# Altium PCB PCB1.PcbDoc
Units mil, origin at the board's own origin, x right, y up, seen from the top; angles counter-clockwise.
Board outline 3937.01 x 1968.5 mil, 2 copper layers (Top Layer, Bottom Layer); 95 components, 84 nets, 313 pads, 79 vias.
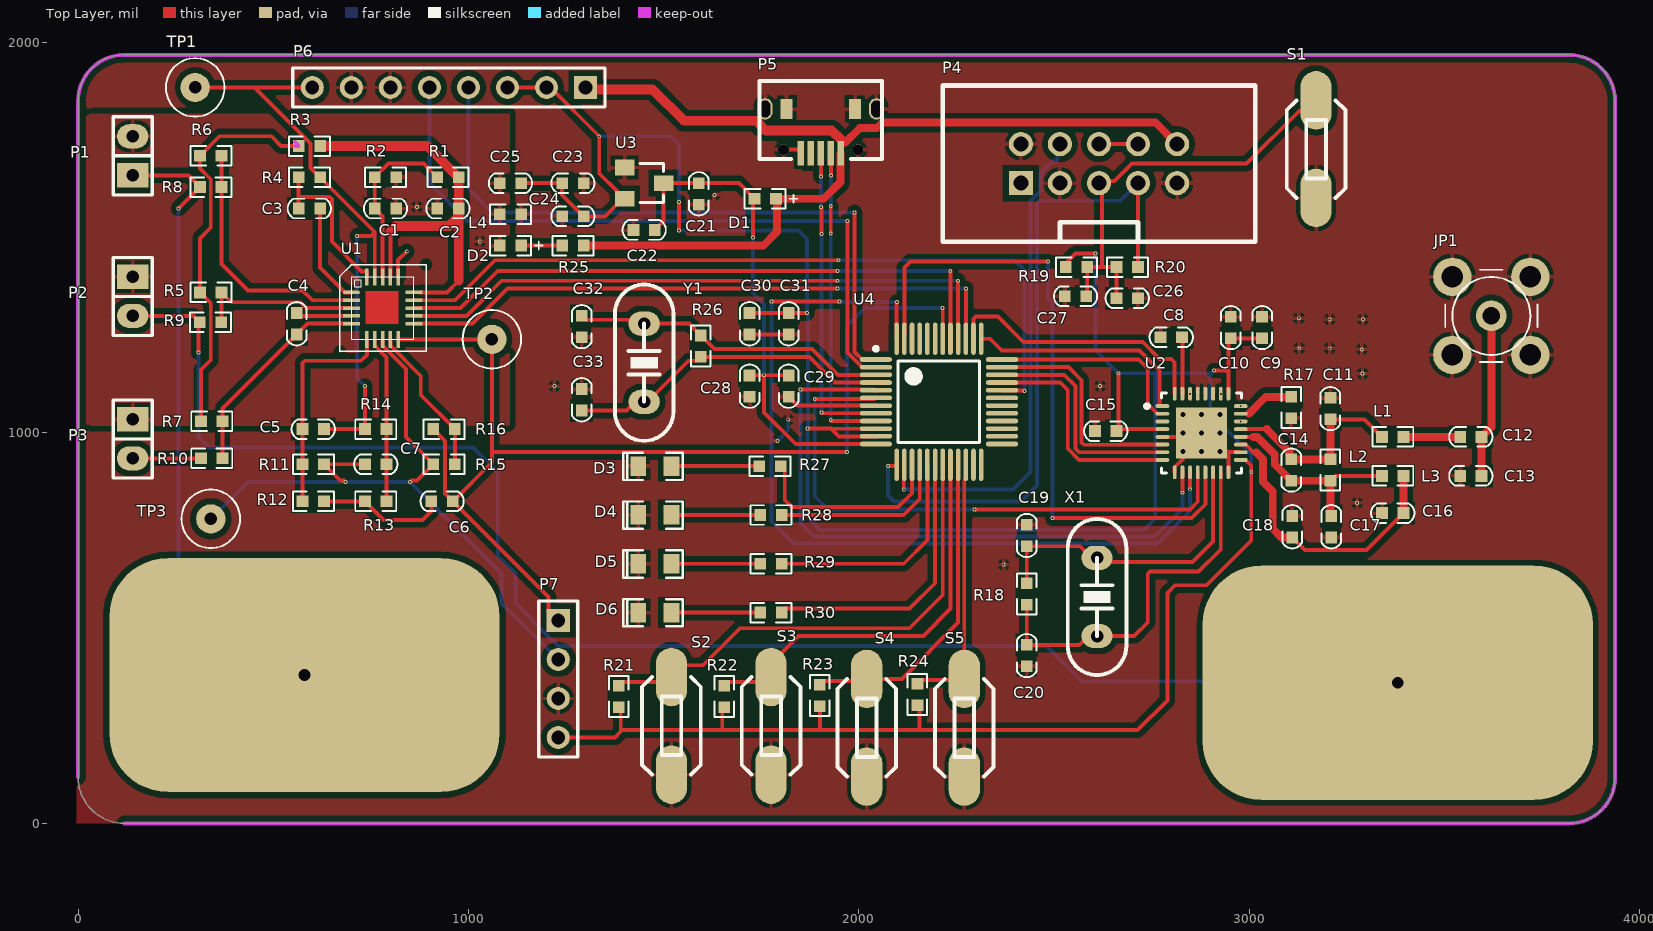
[diagram p0: Top Layer view]
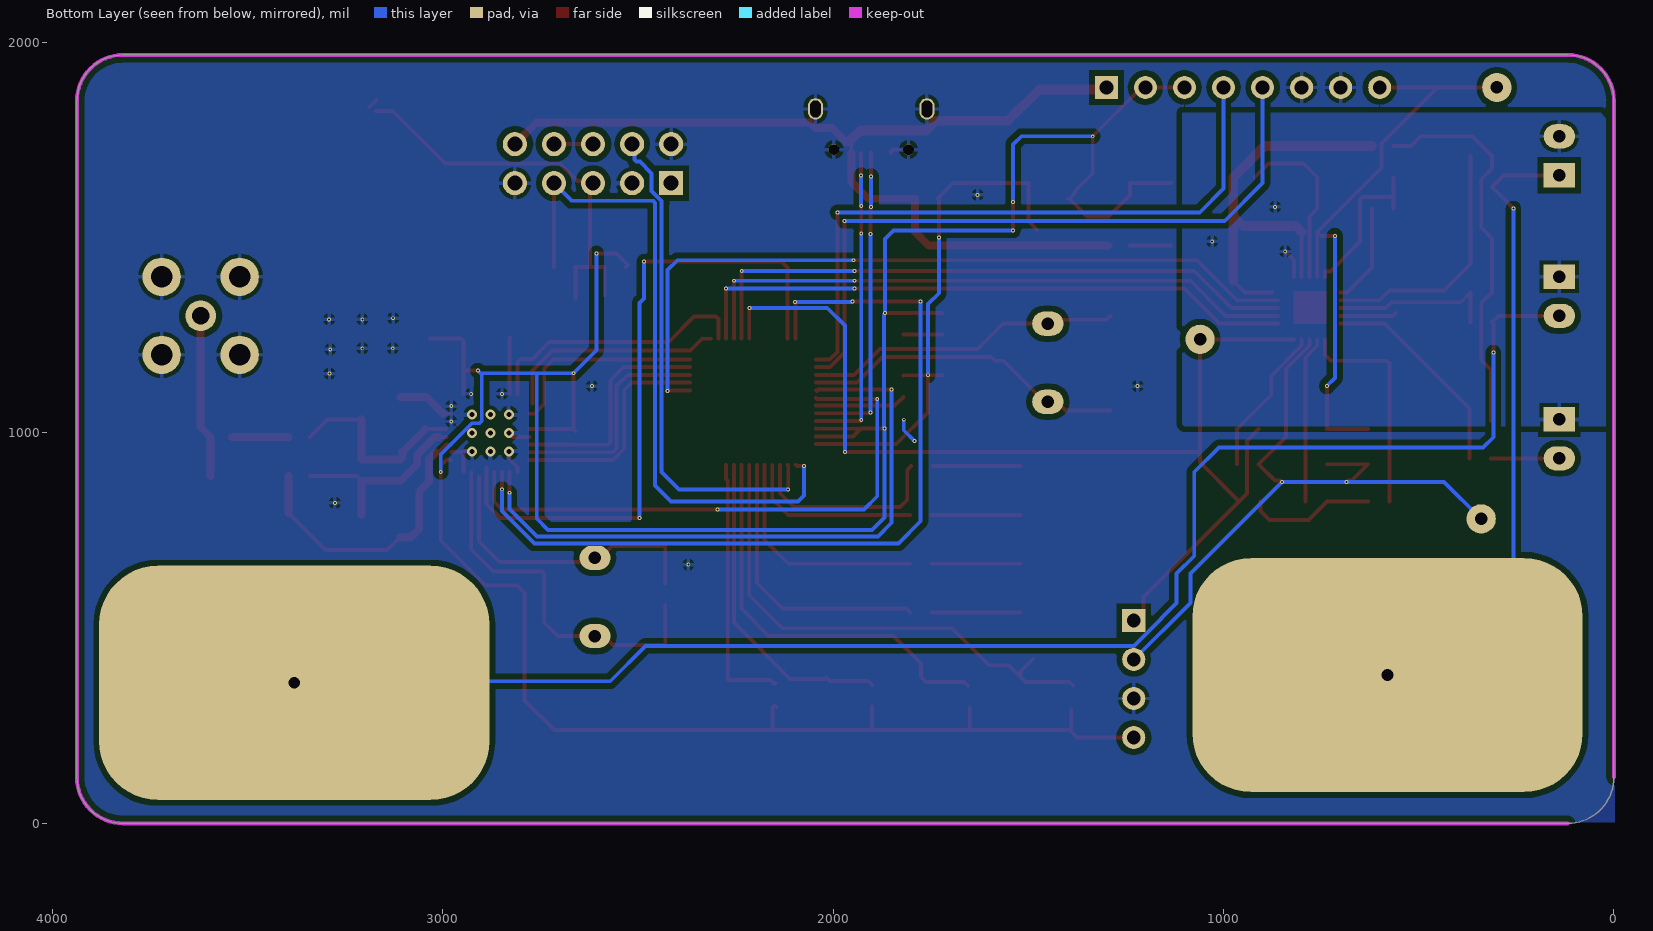
[diagram p1: Bottom Layer view, seen from below]
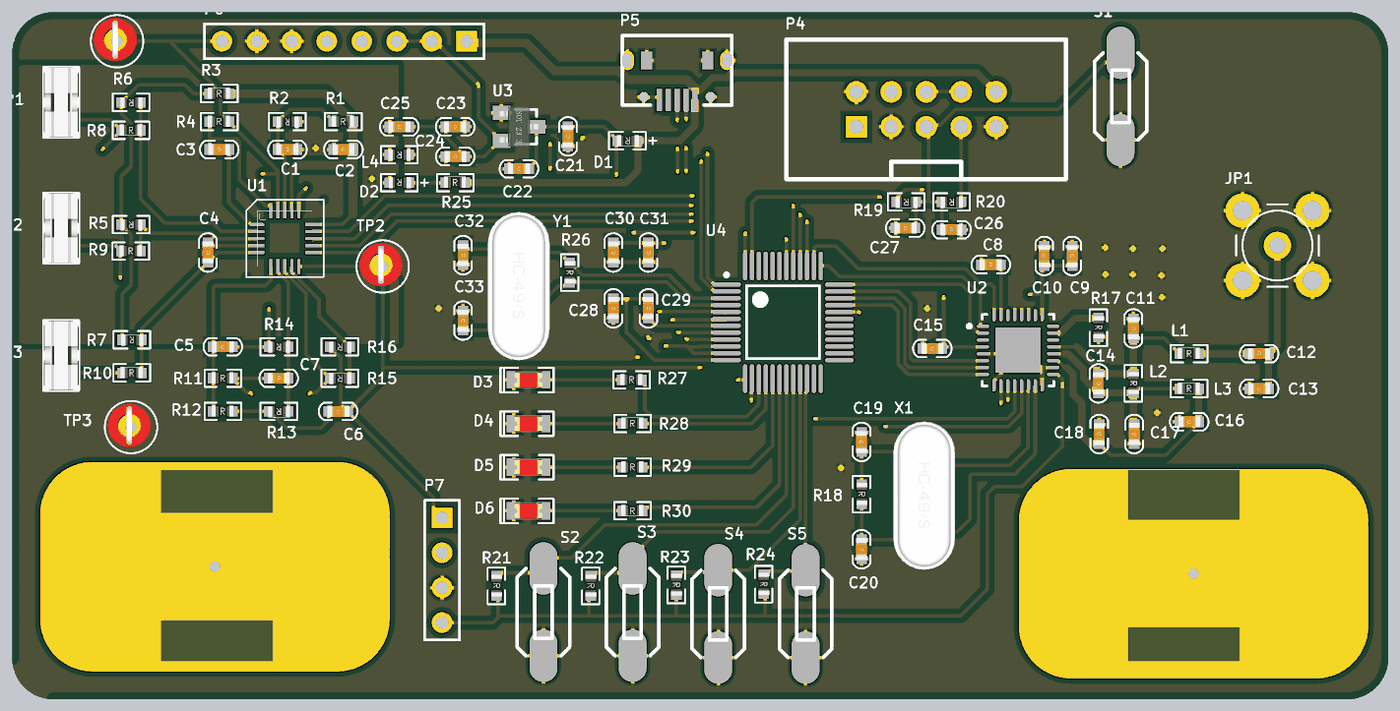
[diagram p2: 3D render of the assembled board from above, using the file's embedded part models]

## Layer stack, top to bottom
Top Solder: solder mask 0.4, Solder Resist, Dk 3.5
Top Layer: signal copper 1.4
Dielectric 1: dielectric 12.6, FR-4, Dk 4.8
Bottom Layer: signal copper 1.4
Bottom Solder: solder mask 0.4, Solder Resist, Dk 3.5

## Board outline
0,118.37 0,1850.39 cw(c118.11,1850.39) 118.11,1968.5 3818.9,1968.5 cw(c3818.9,1850.39) 3937.01,1850.39 3937.01,118.11 cw(c3818.9,118.11) 3818.9,0 118.38,0 cw(c118.38,118.37)

## Design rules (kind name [scope] priority, off if disabled: settings)
Clearance poly [InPolygon] p1: gap=15 ignorepadtopadclearanceinfootprint=TRUE
Clearance Clearance_1 [All] p2: gap=0 ignorepadtopadclearanceinfootprint=TRUE
MinimumSolderMaskSliver [All] p1: minsoldermaskwidth=1
PolygonConnect [All] p1: connectstyle=Relief reliefconductorwidth=10 reliefentries=4 polygonreliefangle="90 Angle" airgapwidth=10
RoutingVias [All] p1: holewidth=5 width=10 viastyle="Through Hole" minholewidth=5 minwidth=10 maxholewidth=5 maxwidth=10
SilkToSilkClearance [All] p1: silktosilkclearance=1
SilkToSolderMaskClearance [IsPad] p1: minsilkscreentomaskgap=1 clearancetoexposedcopper=TRUE
SolderMaskExpansion [All] p1: expansion=4 istentingtop=FALSE
Width [All] p1: maxlimit=25 minlimit=1 preferedwidth=10 minimp=50.000000 maximp=50.000000 favimp=50.000000
27 further rules are at their usual default settings.

## Classes and differential pairs
component class Sheet3: C21 C22 C23 C24 C25 C26 C27 C28 C29 C30 C31 C32 C33 D1 D2 D3 D4 D5 D6 L4 P4 P5 P6 P7 R19 R20 R21 R22 R23 R24 R25 R26 R27 R28 R29 R30 S1 S2 S3 S4 S5 U3 U4 Y1
component class Sheet2: C8 C9 C10 C11 C12 C13 C14 C15 C16 C17 C18 C19 C20 JP1 L1 L2 L3 R17 R18 U2 X1
component class Sheet1: C1 C2 C3 C4 C5 C6 C7 P1 P2 P3 R1 R2 R3 R4 R5 R6 R7 R8 R9 R10 R11 R12 R13 R14 R15 R16 TP1 TP2 TP3 U1

## Components (designator, comment, footprint, x,y, rotation, side; value= is the part's Value field where it differs from the comment)
C1 "0.1uF" 0603C 787.5,1575 r180 top value=4700pF
C2 "0.1uF" 0603C 947.5,1575 r0 top value=4700pF
C3 "0.22uF" 0603C 592.5,1575 r180 top value=4700pF
C4 "1nF" 0603C 560,1280 r90 top value=4700pF
C5 "0.22uF/NC" 0603C 602.5,1010 r0 top value=4700pF
C6 "3.3nF/NC" 0603C 932.5,825 r0 top value=4700pF
C7 "22nF/NC" 0603C 762.5,920 r180 top value=4700pF
C8 "10nF" 0603C 2800,1245 r180 top value=4700pF
C9 "33pF" 0603C 3032.76,1270 r270 top value=4700pF
C10 "4.7nF" 0603C 2952.76,1270 r270 top value=4700pF
C11 "18pF" 0603C 3207.76,1062.5 r90 top value=4700pF
C12 "6.8pF" 0603C 3567.5,990 r180 top value=4700pF
C13 "" 0603C 3567.5,890 r0 top value=4700pF
C14 "" 0603C 3107.76,905 r90 top value=4700pF
C15 "33p" 0603C 2632.5,1005 r0 top value=4700pF
C16 "180pF" 0603C 3367.5,795 r0 top value=4700pF
C17 "18pF" 0603C 3210,760 r90 top value=4700pF
C18 "33nF" 0603C 3110,760 r270 top value=4700pF
C19 "15P" 0603C 2430,737.5 r270 top value=4700pF
C20 "15P" 0603C 2430,430 r90 top value=4700pF
C21 "106" 0603C 1590,1612.5 r90 top value=4700pF
C22 "104" 0603C 1450,1520 r0 top value=4700pF
C23 "106" 0603C 1267.5,1640 r180 top value=4700pF
C24 "104" 0603C 1267.5,1555 r0 top value=4700pF
C25 "4700pF" 0603C 1107.5,1640 r0 top
C26 "104" 0603C 2687.5,1345 r180 top value=4700pF
C27 "106" 0603C 2555,1350 r0 top value=4700pF
C28 "104" 0603C 1720,1120 r90 top value=4700pF
C29 "106" 0603C 1820,1120 r90 top value=4700pF
C30 "106" 0603C 1720,1280 r90 top value=4700pF
C31 "104" 0603C 1820,1280 r90 top value=4700pF
C32 "30pF" 0603C 1290,1272.5 r90 top value=4700pF
C33 "30pF" 0603C 1290,1085 r270 top value=4700pF
D1 "1N4007" 0603-D 1760,1600 r180 top
D2 "LED2" 0603-D 1107.5,1480 r180 top
D3 "LED2" LED0805R 1520,915 r180 top
D4 "LED2" LED0805R 1520,790 r180 top
D5 "LED2" LED0805R 1520,665 r180 top
D6 "LED2" LED0805R 1520,540 r180 top
JP1 "Header 5" SMA 3620,1300 r0 top
L1 "Inductor" 0603 3367.5,990 r0 top value=39nH
L2 "Inductor" 0603 3207.76,905 r270 top value=12nH
L3 "Inductor" 0603 3367.5,890 r0 top value=39nH
L4 "Inductor" 0603 1107.5,1560 r180 top value=100MHz600R
P1 "Header 2" SIP2 140,1660 r90 top
P2 "Header 2" SIP2 140,1400 r270 top
P3 "Header 2" SIP2 140,1035 r270 top
P4 "Header 10" IDC10L 2415,1640 r0 top
P5 "USB-mini" USB-Micro 1902.4,1727.05 r0 top
P6 "Header 8" HDR1X8 1300,1885 r180 top
P7 "Header 4" HDR1X4 1230,520 r270 top
R1 "10M" 0603R 947.5,1655 r0 top value=50K
R2 "10M" 0603R 787.5,1655 r180 top value=50K
R3 "0/NC" 0603R 592.5,1735 r0 top value=50K
R4 "10M" 0603R 592.5,1655 r0 top value=50K
R5 "10M" 0603R 340,1360 r180 top value=50K
R6 "10M" 0603R 340,1710 r180 top value=50K
R7 "NC/0" 0603R 342.5,1030 r180 top value=50K
R8 "180K" 0603R 340,1630 r0 top value=50K
R9 "180K" 0603R 339.5,1284 r0 top value=50K
R10 "360K/NC" 0603R 342.5,935 r0 top value=50K
R11 "100K/NC" 0603R 602.5,920 r0 top value=50K
R12 "1M/NC" 0603R 602.5,825 r0 top value=50K
R13 "1M/NC" 0603R 762.5,825 r180 top value=50K
R14 "NC/0" 0603R 762.5,1010 r180 top value=50K
R15 "100K/NC" 0603R 937.5,920 r180 top value=50K
R16 "1M/0" 0603R 937.5,1010 r180 top value=50K
R17 "22K" 0603R 3107.76,1065 r270 top value=50K
R18 "1M" 0603R 2430,587.5 r270 top value=50K
R19 "1K" 0603R 2557.5,1425 r180 top value=50K
R20 "50K" 0603R 2687.5,1425 r180 top
R21 "10K" 0603R 1385,325 r270 top value=50K
R22 "10K" 0603R 1655,325 r270 top value=50K
R23 "10K" 0603R 1900,327.5 r270 top value=50K
R24 "10K" 0603R 2150,330 r270 top value=50K
R25 "2K" 0603R 1267.5,1480 r0 top value=50K
R26 "10M" 0603R 1595,1222.5 r270 top value=50K
R27 "3.6K" 0603R 1772.5,915 r0 top value=50K
R28 "3.6K" 0603R 1775,790 r0 top value=50K
R29 "3.6K" 0603R 1775,665 r0 top value=50K
R30 "3.6K" 0603R 1775,540 r0 top value=50K
S1 "SW-PB" SW-BP-SMD 3171,1727 r90 top
S2 "SW-PB" SW-BP-SMD 1520,250 r90 top
S3 "SW-PB" SW-BP-SMD 1775,250 r90 top
S4 "SW-PB" SW-BP-SMD 2020,245 r90 top
S5 "SW-PB" SW-BP-SMD 2270,245 r90 top
TP1 "TP-1" tp-1-1 300,1885 r0 top
TP2 "TP-1" tp-1-1 1060,1240 r0 top
TP3 "TP-1" tp-1-1 340,780 r0 top
U1 "AD8232" QFN-20 700,1360 r0 top
U2 "NRF905" QFN32_M 2877.76,1000 r0 top
U3 "XC6206" SOT-23-123 1450,1640 r90 top
U4 "C8051F340/1/4/5" TQFP48_M 2205,1080 r0 top
X1 "16M" CY2 2610,680 r270 top
Y1 "3.2768MHz" CY2 1450,1280 r270 top

## Footprints (in the part's own frame and the unit in brackets; to place one, negate y for a bottom-side part, rotate by r counter-clockwise, add the part's x,y. Pads: shape width x height; smd on the part's side, far side on the other; paste and mask are expansions set on the pad)
0603 [mil]
  rect 30x30 smd: 1(-27.5,0) 2(27.5,0)
  silkscreen extent -52,-25 52,25, body extent -32,-15 30,17, height 21
0603-D [mil]
  rect 30x30 smd: A(-27.5,0) K(27.5,0)
  silkscreen extent -82,-25 52,25, body extent -33,-16 30,16, height 21
0603C [mil]
  rect 30x30 smd: 1(-27.5,0) 2(27.5,0)
  silkscreen extent -55,-25 55,25, body extent -31,-16 32,16, height 35
0603R [mil]
  rect 30x30 smd: 1(-27.5,0) 2(27.5,0)
  silkscreen extent -52,-25 52,25, body extent -32,-15 30,17, height 21
CY2 [mil]
  oval 62x80 hole 32: 1(0,0) 2(200,0)
  silkscreen extent -100,-75 300,75, body extent -116,-89 309,88, height 138
HDR1X4 [mm] "Connector; Header; 4 Position"
  rect 1.5x1.5 hole 0.9: 1(0,0)
  round 1.5 hole 0.9: 2(2.54,0) 3(5.08,0) 4(7.62,0)
  silkscreen extent -1.27,-1.27 8.89,1.27
HDR1X8 [mm] "Connector; Header; 8 Position"
  rect 1.5x1.5 hole 0.9: 1(0,0)
  round 1.5 hole 0.9: 2(2.54,0) 3(5.08,0) 4(7.62,0) 5(10.16,0) 6(12.7,0) 7(15.24,0) 8(17.78,0)
  silkscreen extent -1.27,-1.27 19.05,1.27
IDC10L [mil]
  rect 62x62 hole 39: 1(0,0)
  round 62 hole 39: 2(0,100) 3(100,0) 4(100,100) 5(200,0) 6(200,100) 7(300,0) 8(300,100) 9(400,0) 10(400,100)
  silkscreen extent -200,-150 600,250
LED0805R [mil]
  rect 40x50 smd: 1(0,0) 2(85,0)
  silkscreen extent -29,-35 123,35, body extent 3,-24 83,25, height 43
QFN32_M [mm] "QFN, 32-Leads, Body 5x5mm, Pitch 0.5mm, IPC Low Density"
  oval 0.9x0.25 smd: 1(-2.55,1.75) 2(-2.55,1.25) 3(-2.55,0.75) 4(-2.55,0.25) 5(-2.55,-0.25) 6(-2.55,-0.75) 7(-2.55,-1.25) 8(-2.55,-1.75) 17(2.55,-1.75) 18(2.55,-1.25) 19(2.55,-0.75) 20(2.55,-0.25) 21(2.55,0.25) 22(2.55,0.75) 23(2.55,1.25) 24(2.55,1.75)
  oval 0.25x0.9 smd: 9(-1.75,-2.55) 10(-1.25,-2.55) 11(-0.75,-2.55) 12(-0.25,-2.55) 13(0.25,-2.55) 14(0.75,-2.55) 15(1.25,-2.55) 16(1.75,-2.55) 25(1.75,2.55) 26(1.25,2.55) 27(0.75,2.55) 28(0.25,2.55) 29(-0.25,2.55) 30(-0.75,2.55) 31(-1.25,2.55) 32(-1.75,2.55)
  rect 3.3x3.3 smd: 33(0,0)
  silkscreen extent -3.67,-2.6 2.6,2.6, body extent -2.58,-2.58 2.58,2.58, height 0.8
QFN-20 [mm]
  oval 1.1x0.23 smd: 1(0,0)
  rect 1.1x0.23 smd: 2(0,-0.508) 3(0,-1.016) 4(0,-1.524) 5(0,-2.032) 11(4.064,-2.032) 12(4.064,-1.524) 13(4.064,-1.016) 14(4.064,-0.508) 15(4.064,0)
  rect 0.23x1.1 smd: 6(1.016,-3.048) 7(1.524,-3.048) 8(2.032,-3.048) 9(2.54,-3.048) 10(3.048,-3.048) 16(3.048,1.016) 17(2.54,1.016) 18(2.032,1.016) 19(1.524,1.016) 20(1.016,1.016)
  Top Layer region: 0.926,0.104 0.926,-2.046 3.076,-2.046 3.076,0.104
  Top Layer lines w0.025: -0.762,-3.841 -0.741,-3.821 ; -0.014,1.792 -0.014,1.812 ; 4.85,1.802 4.861,1.812
  silkscreen extent -0.76,-3.84 4.86,1.81
SIP2 [mil]
  rect 62x80 hole 32: 1(0,0)
  oval 62x80 hole 32: 2(100,0)
  silkscreen extent -50,-50 150,50, body extent -50,-50 150,50, height 646
SMA [mm] "Connector; RF Coaxial, MCX, Thru-Hole; 5 Position; Right-Angle"
  round 2 hole 1.143: 1(0,0)
  round 2.5 hole 1.397: 2(-2.54,-2.54) 2(-2.54,2.54) 2(2.54,-2.54) 2(2.54,2.54)
  silkscreen extent -3,-3 3,3
SOT-23-123 [mil]
  rect 40x50 smd: 1(40,50) 2(-40,50) 3(0,-50)
  silkscreen extent -50,-50 50,10, body extent -57,-55 57,55, height 47
SW-BP-SMD [mil]
  oval 150x80 smd: 1(-125,0) 2(125,0)
  silkscreen extent -125,-75 125,75
tp-1-1 [mil]
  round 75 hole 32: 1(0,0)
  silkscreen extent -75,-75 75,75, body extent -67,-57 57,67, height 320
TQFP48_M [mm] "48-Pin Thin Quad Flat Pack 0.5 mm Pitch, IPC Low Density"
  oval 2.1x0.3 smd: 1(-4.1,2.75) 2(-4.1,2.25) 3(-4.1,1.75) 4(-4.1,1.25) 5(-4.1,0.75) 6(-4.1,0.25) 7(-4.1,-0.25) 8(-4.1,-0.75) 9(-4.1,-1.25) 10(-4.1,-1.75) 11(-4.1,-2.25) 12(-4.1,-2.75) 25(4.1,-2.75) 26(4.1,-2.25) 27(4.1,-1.75) 28(4.1,-1.25) 29(4.1,-0.75) 30(4.1,-0.25) 31(4.1,0.25) 32(4.1,0.75) 33(4.1,1.25) 34(4.1,1.75) 35(4.1,2.25) 36(4.1,2.75)
  oval 0.3x2.1 smd: 13(-2.75,-4.1) 14(-2.25,-4.1) 15(-1.75,-4.1) 16(-1.25,-4.1) 17(-0.75,-4.1) 18(-0.25,-4.1) 19(0.25,-4.1) 20(0.75,-4.1) 21(1.25,-4.1) 22(1.75,-4.1) 23(2.25,-4.1) 24(2.75,-4.1) 37(2.75,4.1) 38(2.25,4.1) 39(1.75,4.1) 40(1.25,4.1) 41(0.75,4.1) 42(0.25,4.1) 43(-0.25,4.1) 44(-0.75,4.1) 45(-1.25,4.1) 46(-1.75,4.1) 47(-2.25,4.1) 48(-2.75,4.1)
  silkscreen extent -4.22,-2.65 2.65,3.57, body extent -3.5,-3.5 3.5,3.5, height 1.6
USB-Micro [mm]
  oval 1x1.4 hole 0.7 slot 1.1 at 90 deg: 0(-3.625,2.615) 0(3.625,2.615)
  round 0.7 hole 0.7: 0(-2.425,-0.035) 0(2.425,-0.035)
  rect 0.8x1.3 smd: 0(-2.225,2.615) 0(2.225,2.615)
  rect 0.4x1.6 smd: 1(1.3,-0.254) 2(0.65,-0.254) 3(0,-0.254) 4(-0.65,-0.254) 5(-1.3,-0.254)
  silkscreen extent -3.98,-0.63 3.98,4.43

## Part data
C1 C2 C3 C4 C5 C6 C7 C8 C9 C10 C11 C12 C13 C14 C15 C16 C17 C18 C19 C20 C21 C22 C23 C24 C25 C26 C27 C28 C29 C30 C31 C32 C33: library part Cap, "Capacitor", LatestRevisionDate=17-Jul-2002, LatestRevisionNote="Re-released for DXP Platform.", PackageDescription="Radial Cap, Thru-Hole; 2 Leads; 0.3 in Pin Spacing", PackageReference=RAD-0.3, Published=8-Jun-2000, Publisher="Altium Limited"
D1: library part DIODE
D2 D3 D4 D5 D6: "Typical RED, GREEN, YELLOW, AMBER GaAs LED", LatestRevisionDate=17-Jul-2002, LatestRevisionNote="Re-released for DXP Platform.", PackageDescription="SM LED; 2 Flat Leads", PackageReference=3.2X1.6X1.1, PackageVersion=Feb-2002, Published=8-Jun-2000, Publisher="Altium Limited"
JP1: "Header, 5-Pin", LatestRevisionDate=17-Jul-2002, LatestRevisionNote="Re-released for DXP Platform.", Publisher="Altium Limited"
P1 P2 P3: "Header, 2-Pin", LatestRevisionDate=17-Jul-2002, LatestRevisionNote="Re-released for DXP Platform.", Publisher="Altium Limited"
P4: "Header, 10-Pin", LatestRevisionDate=17-Jul-2002, LatestRevisionNote="Re-released for DXP Platform.", Publisher="Altium Limited"
P6: "Header, 8-Pin", LatestRevisionDate=17-Jul-2002, LatestRevisionNote="Re-released for DXP Platform.", Publisher="Altium Limited"
P7: "Header, 4-Pin", LatestRevisionDate=17-Jul-2002, LatestRevisionNote="Re-released for DXP Platform.", Publisher="Altium Limited"
R1 R2 R3 R4 R5 R6 R7 R8 R9 R10 R11 R12 R13 R14 R15 R16 R17 R18 R19 R20 R21 R22 R23 R24 R25 R26 R27 R28 R29 R30: library part Res2, "Resistor", LatestRevisionDate=17-Jul-2002, LatestRevisionNote="Re-released for DXP Platform.", PackageDescription="Axial Device, Thru-Hole; 2 Leads; 0.4 in Pin Spacing", PackageReference=AXIAL-0.4, Published=8-Jun-2000, Publisher="Altium Limited"
S1 S2 S3 S4 S5: "Switch", LatestRevisionDate=17-Jul-2002, LatestRevisionNote="Re-released for DXP Platform.", PackageDescription="Switch; 2 Leads", PackageReference=SPST-2, Published=24-Mar-1999, Publisher="Altium Limited"
X1 Y1: library part XTAL, "Crystal Oscillator", LatestRevisionDate=17-Jul-2002, LatestRevisionNote="Re-released for DXP Platform.", PackageDescription="Crystal, Thru-Hole; 2 Leads; Body 3.1 x 8.2 mm (Dia.xH)", PackageReference=R38, Published=8-Jun-2000, Publisher="Altium Limited"
L1 L2 L3 L4: Code_IEC=1005, Code_JEITA=0402, LatestRevisionDate=29-May-2009, LatestRevisionNote="IPC-7351 Footprint Added.", PackageDescription="Chip Inductor", PackageReference=0402-A, Published=8-Jun-2000, Publisher="Altium Limited"

## Free pads (board coordinates)
  rrect50% 1000x600 hole 30: 14(3380,360) 15(580,380)

## Via types
v1: diameter 10, hole 5, Top Layer to Bottom Layer, 70 vias
v2: diameter 25.98, hole 12.99, Top Layer to Bottom Layer, tented top, 9 vias

## Nets (pads, with @x,y where several pads share a name; then routed paths per layer and width w, separated by ;. In a path a pad name is that pad's centre, name@x,y a point inside that pad or via, vN(x,y) a via of type N, cw(c..) or ccw(c..) an arc to the next point about the centre after c; other vN are vias at no path point)
+3.3V: C2.2 R1.2 R3.2 U1.15 U1.17 | length 1067.6
  Top Layer w10: U1.17 800,1515.36 ; U1.15@876.18,1360 945,1360 975,1390
  Top Layer w25: R3.2 895,1735 R1.2 C2.2 975,1390 ; 800,1515.36 814.64,1530 950,1530 972.5,1552.5
+5: D1.A P4.10 P5.1 P6.1 R25.2 | length 2493.3
  Top Layer w10: D1.A D1.A@1790,1600 ; P5.1@1952.88,1716.35 P5.1 1953.58,1740.67 P5.1@1956.46,1743.54
  Top Layer w20: R25.2 1755,1480 1790,1515 1790,1600 1910,1600 1952.88,1642.88 P5.1@1952.88,1716.35 ; P5.1@1956.46,1743.54 1964.54,1743.54 2002,1781 2045.97,1781 2059.97,1795 2760,1795 P4.10
  Top Layer w25: P6.1 1305,1880 1471.49,1880 1551.55,1799.94 1736.36,1799.94 1761.33,1774.97 1930.03,1774.97 1955,1750
AGND: C1.1 C2.1 C25.1 D2.K L4.2 P1.2 P2.1 P3.1 R2.1 U1.16 | length 74.1
  Top Layer w10: U1.16 820,1443 v1(842,1465)
  other v1: 1029,1491 868,1579
C2CK: P4.7 R20.1 U4.13 | length 1720.6
  Top Layer w10: v1(2075,915) 2093.15,915 U4.13 ; R20.1 P4.7
  Bottom Layer w10: v1(2075,915) 2075,840 2090,825 2415,825 2456,866 2456,1589.14 2461.86,1595 2670,1595 P4.7
C2D: P4.4 U4.14 | length 1284.4
  Top Layer w10: v1(2115,855) 2115,917.16 U4.14
  Bottom Layer w10: v1(2115,855) 2395,855 2440,900 2440,1585 2439.14,1585.86 2439.14,1594.14 2465,1620 2465,1665 2495,1695 2503.23,1695 2509.09,1700.86 2509.09,1734.09 P4.4
D+: P5.3 U4.8 | length 805.8
  Top Layer w10: v1(1902.6,1657.4) P5.3@1902.6,1717.05 ; v1(1903,1579) 1904,1578 v1(1904,1510) ; v1(1904,1052) 1905.53,1050.47 U4.8
  Bottom Layer w10: v1(1902.6,1657.4) 1902.6,1579.4 v1(1903,1579) ; v1(1904,1052) v1(1904,1510)
D-: P5.2 U4.9 | length 800.6
  Top Layer w10: v1(1928,1033) 1930.21,1030.79 U4.9 ; v1(1928,1511) v1(1928,1581) ; v1(1928.19,1660) P5.2@1928.19,1717.05
  Bottom Layer w10: v1(1928,1033) v1(1928,1511) ; v1(1928,1581) 1928.19,1581.19 v1(1928.19,1660)
GND: C8.2 C9.1 C10.1 C11.2 C13.1 C15.1 C16.1 C17.1 C18.1 C19.1 C20.1 C21.1 C22.1 C23.1 C24.1 C26.1 C27.1 C28.1 C29.1 C30.1 C31.1 C32.1 C33.1 D3.2 D4.2 D5.2 D6.2 JP1.2 L4.1 P4.2 P4.3 P4.9 P5.0 P5.5 P6.6 P6.7 P7.3 R17.2 S1.1 S2.1 S3.1 S4.1 S5.1 U2.5 U2.9 U2.16 U2.18 U2.22 U2.24 U2.26 U2.27 U2.28 U2.29 U2.30 U2.33 U3.1 U4.7 | length 674.5
  Top Layer w10: C30.1 C31.1 ; P5.0@1807.13,1725.67 1848.54,1725.67 1851.42,1722.8 P5.5@1851.42,1717.05 ; C29.1 1842.5,1070 1862,1070 1862.16,1070.16 U4.7 ; U2.5 2820.67,990.16 v2(2830.51,1000) ; U2.9 2808.86,912.24 2830.51,933.9 v2(2830.51,952.76) ; v2(2925,952.76) 2943.54,952.76 2945.43,950.87 ; U2.16 2946.65,949.65 2945.43,950.87 ; U2.18 2978.07,950.87 2945.43,950.87
  Bottom Layer w10: v1(1792,980) 1819,1007 v1(1819,1034)
  other v1: 2371,663 3276,821 2978.15,1029.53 2978.15,1068.9 2848.23,1100.39 2926.97,1100.39 1220,1120 2618,1120 3290,1152 3288,1214 3128,1217 3206,1217 3206,1291 3291,1291 3127,1294 1630,1610
  other v2: 2877.76,952.76 2877.76,1000 2925,1000 2830.51,1047.24 2877.76,1047.24 2925,1047.24
"IA OUT": C5.2 P6.8 R4.2 R14.2 TP1.1 U1.19 | length 1570
  Top Layer w10: TP1.1 452.07,1885 ; P6.8 452.07,1885 ; C5.2 R14.2 v1(735,1120) ; v1(715,1505) 750,1505 760,1515 ; U1.19 760,1515 ; 452.07,1885 595.86,1741.21 595.86,1679.14 R4.2 760,1515
  Bottom Layer w10: v1(715,1505) 715,1141.01 735,1121.01 v1(735,1120)
LA: P1.1 pad.15 R8.1 | length 1613.9
  Top Layer w10: P1.1 282.5,1660 R8.1 v1(257.5,1575)
  Bottom Layer w10: v1(257.5,1575) 257.5,663.96 541.46,380 pad.15
MISO: U2.10 U4.5 | length 1654.7
  Top Layer w10: v1(1850,1111) 2037.05,1111 2041.05,1107 U4.5 ; U2.10 2828.54,847.85 v1(2829.42,846.97)
  Bottom Layer w10: v1(1850,1111) 1850,770 1885,735 2758.69,735 2829.42,805.74 v1(2829.42,846.97)
MOSI: U2.11 U4.48 | length 2210.2
  Top Layer w10: v1(1776,1337) v1(1950,1337) ; U4.48 2096.73,1334.73 v1(2098,1336) ; v1(2848.23,855.86) U2.11
  Bottom Layer w10: v1(1776,1337) 1776,774 1833,717 2765,717 2848.23,800.23 v1(2848.23,855.86) ; v1(1950,1337) 1951,1336 v1(2098,1336)
NC: P4.6 P4.8 | length 100
  Top Layer w10: P4.6 P4.8
NetC1_2: C1.2 R1.1 R2.2 U1.18 | length 452.3
  Top Layer w10: U1.18 780,1555 C1.2 R2.2 795,1690 885,1690 R1.1
NetC3_1: C3.1 U1.1 | length 257.6
  Top Layer w10: C3.1 620,1423.82 683.82,1360 U1.1
NetC3_2: C3.2 R4.1 U1.20 | length 411.1
  Top Layer w10: C3.2 565,1605 565,1645 R4.1 ; 565.69,1605 644.14,1605 650,1599.14 650,1490 725.97,1414.03 739.53,1414.03 740,1413.56 U1.20
NetC4_1: C4.1 R7.1 R10.2 U1.5 | length 547.6
  Top Layer w10: R10.2 R7.1 370,1062.5 C4.1 587.5,1280 U1.5
NetC4_2: C4.2 U1.4 | length 143.1
  Top Layer w10: C4.2 567.5,1300 U1.4
NetC6_1: C6.1 R12.2 R13.2 | length 329
  Top Layer w10: R12.2 R13.2 782.5,777.5 882.5,777.5 905,800 C6.1
NetC8_1: C8.1 U2.31 | length 145
  Top Layer w10: C8.1 2828.54,1243.96 2828.54,1207.24 U2.31
NetC11_1: C11.1 C14.2 L1.1 L2.1 U2.21 | length 511
  Top Layer w10: U2.21@2990.87,1009.92 2991.02,1009.92 2991.1,1010 3045,1010 ; C11.1 3295,1035 L1.1
  Top Layer w20: 3045,1010 3102.76,952.24 3102.76,937.5 C14.2 L2.1 C11.1
NetC12_1: C12.1 C13.2 JP1.1 | length 420.4
  Top Layer w20: C13.2 C12.1 3620,1015 JP1.1
NetC12_2: C12.2 L1.2 | length 145
  Top Layer w20: L1.2 C12.2
NetC14_1: C14.1 C17.2 L2.2 L3.1 U2.20 | length 507.1
  Top Layer w10: U2.20@2990,989.84 3010.16,989.84 ; C17.2@3207.76,789.74 C17.2 ; L2.2 3220.26,890 L3.1
  Top Layer w20: 3010.16,989.84 3020.16,989.84 3065,945 3065,920.26 C14.1 L2.2 C17.2@3207.76,789.74
NetC16_2: C16.2 C18.2 L3.2 U2.19 | length 752.8
  Top Layer w10: U2.19 2990.79,970.47 2990.95,970.31 3011.26,950 3017.88,950 ; C18.2 3142.5,700 3300,700 C16.2
  Top Layer w20: 3017.88,950 3035,932.88 3035,875 3060,850 3060,755 3082.5,732.5 C18.2 ; C16.2 L3.2
NetC19_2: C19.2 R18.1 U2.14 X1.1 | length 792.1
  Top Layer w10: R18.1 C19.2 2565.95,710 2595.95,680 X1.1 ; X1.1@2588.89,670.05 2650.81,670.05 2650.86,670 2855,670 2906.67,721.67 2906.67,886.36 U2.14@2907.21,886.89
NetC20_2: C20.2 R18.2 U2.15 X1.2 | length 971.1
  Top Layer w10: R18.2 C20.2 2564.43,457.5 2586.93,480 X1.2 2705,480 2740,515 2740,639.14 2745.86,645 2870,645 2926.97,701.97 U2.15
NetC26_2: C26.2 C27.2 P4.5 R19.1 R20.2 S1.2 | length 1113.1
  Top Layer w10: C27.2@2585,1352.5 R19.1 2622.5,1425 ; C26.2 R20.2 2622.5,1425 ; S1.2@3171,1825 3128.03,1825 2993.03,1690 2700,1690 2655.03,1645.03 2620.03,1645.03 P4.5 2622.5,1632.5 2622.5,1425 ; S1.2 S1.2@3188.16,1834.84
  Bottom Layer w10: P4.5 P4.5@2622.5,1632.5
NetD2_A: D2.A R25.1 | length 105
  Top Layer w10: D2.A R25.1
NetD3_1: D3.1 R27.1 | length 225
  Top Layer w10: D3.1 R27.1
NetD4_1: D4.1 R28.1 | length 227.5
  Top Layer w10: D4.1 R28.1
NetD5_1: D5.1 R29.1 | length 227.5
  Top Layer w10: D5.1 R29.1
NetD6_1: D6.1 R30.1 | length 227.5
  Top Layer w10: D6.1 R30.1
NetR3_1: R3.1 R5.2 R6.2 R7.2 | length 1008.1
  Top Layer w10: R7.2 315,1162.04 340,1187.04 340,1332.5 R5.2 312.5,1498.54 340,1526.04 340,1650 312.5,1677.5 R6.2 362.5,1760 495,1760 520,1735 R3.1
NetR5_1: R5.1 R9.2 U1.3 | length 425.3
  Top Layer w10: R9.2 367,1359.5 R5.1 392.5,1335 569.57,1335 584.57,1320 U1.3
NetR6_1: R6.1 R8.2 U1.2 | length 648.3
  Top Layer w10: R6.1 R8.2 367.5,1432.5 435,1365 575,1365 600,1340 U1.2
NetR17_1: R17.1 U2.23 | length 147.5
  Top Layer w10: U2.23 2999.21,1049.21
  Top Layer w20: 2999.21,1049.21 3042.5,1092.5 R17.1
OPAMP+: C7.1 R13.1 R14.1 U1.7 | length 427.4
  Top Layer w10: U1.7 760,1223.82 790,1193.82 R14.1 C7.1 R13.1
OPAMP-: R15.1 R16.1 U1.9 | length 388.3
  Top Layer w10: U1.9 800,1223.82 877.74,1146.08 877.74,1097.26 R16.1 R15.1
P0.7: U2.13 U4.47 | length 1718.3
  Top Layer w10: U4.47 2116.42,1423.42 2132,1439 v1(2484,1439) ; v1(2496,782) 2852,782 2887.6,817.6 U2.13 U2.13@2887.6,912.24
  Bottom Layer w10: v1@2484,1438.3 2484,1345 2496,1333 v1(2496,782)
P1.0: U4.46
P1.1: U4.45
P1.2: U4.44
P1.3: U4.43
P1.4: C6.2 P7.1 R16.2 TP2.1 U1.10 U4.42 | length 2893.5
  Top Layer w10: U1.10 TP2.1 1060,951 ; R16.2 940,980 940,845 C6.2 ; P7.1 1205.47,544.53 1205.47,579.53 C6.2 ; v1@1969,951 1060,951 ; v1(2214,1320) 2214.84,1319.16 U4.42 ; C6.2 1060,925 1060,951
  Bottom Layer w10: v1(1970,951) 1970,1275 2015,1320 v1(2214,1320)
P1.5: U1.13 U4.41 | length 1587.2
  Top Layer w10: U1.13 980,1320 1075,1415 v1(1945,1415) ; v1(2234,1415) 2234.53,1414.47 U4.41
  Bottom Layer w10: v1(1945,1415) v1(2234,1415)
P1.6: U1.12 U4.40 | length 1579.9
  Top Layer w10: U1.12 995,1300 1085,1390 v1(1945,1390) ; v1(2254,1390) 2254,1241.63 U4.40
  Bottom Layer w10: v1(1945,1390) v1(2254,1390)
P1.7: U1.11 U4.39 | length 1579.9
  Top Layer w10: U1.11 1010,1280 1100,1370 v1(1945,1370) ; U4.39 2274,1241.52 v1(2274,1370)
  Bottom Layer w10: v1(1945,1370) v1(2274,1370)
P2.0: U2.32 U4.38 | length 697.4
  Top Layer w10: U4.38 2293.93,1241.76 2293.93,1292.14 2299.79,1298 2356,1298 2421,1233 2727,1233 2770,1190 2800,1190 2808.86,1181.14 U2.32
P2.1: U2.1 U4.37 | length 575.5
  Top Layer w10: U4.37 2335.58,1241.42 2366,1211 2719,1211 2770,1160 2770,1075
P2.2: U2.2 U4.36 | length 521.9
  Top Layer w10: U4.36 2716.73,1188.27 2740,1165 2740,1073.94 2764.72,1049.21 U2.2
P2.3: U2.6 U4.35 | length 586.6
  Top Layer w10: U4.35 2536.42,1168.58 2570,1135 2570,975.86 2575.86,970 2670.05,970 2670.53,970.47 U2.6
P2.4: U2.7 U4.34 | length 586.7
  Top Layer w10: U4.34 2526.1,1148.9 2555,1120 2555,960 2564.21,950.79 U2.7
P2.5: U2.8 U4.33 | length 580.9
  Top Layer w10: U4.33 2515.79,1129.21 2535,1110 2535,960 2563.9,931.1 U2.8
P2.6: U1.14 U4.32 | length 1984.2
  Top Layer w10: U1.14 965,1340 1067.5,1442.5 v1(1947.5,1442.5) ; U4.32 2366.7,1109.24 2422.76,1109.24 v1(2424,1108)
  Bottom Layer w10: v1(1947.5,1442.5) 2398.5,1442.5 2424,1417 v1(2424,1108)
P2.7: U4.31
P3.0: U4.30
P3.1: U4.29
P3.2: U4.28
P3.3: U4.27
P3.4: U4.26
P3.5: U4.25
P3.6: U4.24
P3.7: U4.23
P4.0: R24.1 S5.2 U4.22 | length 678.7
  Top Layer w10: R24.1@2147.66,359.84 R24.1 2160,367.5 2267.5,367.5 S5.2 2270,878.76 2273.9,882.66 U4.22
P4.1: R23.1 S4.2 U4.21 | length 822.6
  Top Layer w10: R23.1 1910,365 2008.34,365 S4.2@2016.67,373.33 ; S4.2 2110,370 2254.21,514.21 U4.21
P4.2: R22.1 S3.2 U4.20 | length 1051.1
  Top Layer w10: R22.1 1665,362.5 1762.5,362.5 S3.2 1775,410 1845,480 2165,480 2235,550 2235,881.4 2234.87,881.52 2234.87,918.24 U4.20
P4.3: R21.1 S2.2 U4.19 | length 1319.6
  Top Layer w10: R21.1 1395,362.5 1507.5,362.5 S2.2 ; S2.2@1487.66,421.39 1520,389.06 S2.2 ; U4.19 2214.84,584.84 2130,500 1695,500 1600,405 1550,405 S2.2
P4.4: R30.2 U4.18 | length 727.2
  Top Layer w10: R30.2 1812.5,550 2130,550 2195.16,615.16 U4.18
P4.5: R29.2 U4.17 | length 591.1
  Top Layer w10: R29.2 2115,665 2175.47,725.47 U4.17
P4.6: R28.2 U4.16 | length 458
  Top Layer w10: R28.2 2115,790 2155.79,830.79 U4.16
P4.7: R27.2 U4.15 | length 511.5
  Top Layer w10: R27.2 1810,905 1810,829 1829,810 2100,810 2135.76,845.76 2135.76,918.24 U4.15
RA: P2.2 pad.14 R9.1 | length 3974.8
  Top Layer w10: P2.2 296,1300 R9.1 309,1281 v1(309,1206)
  Bottom Layer w10: v1(309,1206) 309,989 335,963 1012,963 1075,900 1075,685 1120,640 1120,565 1159.2,525.8 1159.2,524.67 1229.35,454.53 2480.47,454.53 2570.87,364.13 pad.14@3379.54,364.13
REGIN: C9.2 C10.2 C15.2 C23.2 C24.2 C25.2 C30.2 C31.2 P6.2 P6.3 P7.4 R19.2 R21.2 R22.2 R23.2 R24.2 U2.4 U2.17 U2.25 U3.2 U4.10 U4.11 | length 8154.4
  Top Layer w10: P6.3 P6.2 1210,1885 v1(1335,1760) 1335,1665 1380,1620 1380,1615 U3.2@1395,1600 ; C25.2 C23.2 1240,1610 C24.2 1350,1555 U3.2@1395,1600 ; P7.4 1375,220 1390,235 ; R21.2@1390,292.5 1390,235 ; U3.2 U3.2@1395,1600 ; v1(1539,1519) v1(1539,1592) ; R22.2@1650,297.5 1650,239 ; C30.2 C31.2 1820.5,1307 v1(1867,1307) ; v1(1868,1012) 1929,1012 1949.58,991.42 U4.11 ; R23.2 1900,239 ; 1931.99,1009.9 U4.10 ; R24.2@2145,297.5 R24.2 2155,297.5 2155,239 ; R19.2 2525,1430 2555,1460 v1(2606,1460) ; C15.2 C15.2@2664.84,1009.84 ; v1(2665,1153) 2665,1010 C15.2@2664.84,1009.84 ; U2.4 C15.2@2664.84,1009.84 ; v1(2910,1160) 2941.65,1160 2946.65,1155 ; U2.25 2946.65,1155 ; U2.17 2990.79,931.1 3005,916.89 v1(3005,900) 3005,725 2890,610 2810,610 2790,590 2790,315 2714,239 2155,239 ; C9.2 C10.2 2946.65,1236.4 2946.65,1155 ; 1390,235 1394,239 1650,239 ; 1650,239 1900,239 ; 1900,239 2155,239
  Bottom Layer w10: v1(1335,1760) 1518,1760 1539,1739 v1(1539,1592) ; v1(1539,1519) 1845,1519 1867,1497 v1(1867,1307) 1870,1304 1870,1016 1868,1014 v1(1868,1012) 1868,784 1900,752 2730,752 2759,781 2759,1153 ; v1(2606,1460) 2606,1212 v1(2665,1153) 2759,1153 ; 2900,1150 2900,1030.86 2905.86,1025 2925.44,1025 3005,945.44 v1(3005,900) ; v1(2910,1160) 2903,1153 2759,1153
RL: P3.2 R10.1 | length 175
  Top Layer w10: P3.2 R10.1
RX0: P6.4 U4.1 | length 1693.2
  Top Layer w10: v1(1989,1565) 1989,1207.91 2008.64,1188.27 U4.1
  Bottom Layer w10: P6.4 1000,1625.86 1060.86,1565 v1(1989,1565)
SCK: U2.12 U4.6 | length 1485.7
  Top Layer w10: v1(1887,1087) 2040.74,1087 U4.6 ; v1(2296,804) 2848,804 2867.91,823.91 U2.12
  Bottom Layer w10: v1(1887,1087) 1887,838 1921,804 v1(2296,804)
SW: C5.1 R11.1 R12.1 U1.6 | length 567.8
  Top Layer w10: R12.1 R11.1 C5.1 575,1179.14 580.86,1185 725,1185 740,1200 U1.6
TX0: P6.5 U4.2 | length 1781.4
  Top Layer w10: v1(1971,1543) 1971,1205.73 2008.15,1168.58 U4.2
  Bottom Layer w10: P6.5 900,1640 997,1543 v1(1971,1543)
UPCLK: U2.3
VBUS: C21.2 C22.2 C28.2 C29.2 D1.K U3.3 U4.12 | length 1360
  Top Layer w10: C22.2 1500,1542.5 U3.3 C21.2 1692.5,1640 D1.K 1729,1596.5 v1(1729,1501) ; C28.2 1721.19,1148.69 1722.26,1147.62 1722.64,1148 v1(1757,1148) ; C29.2 1819.5,1148 v1(1757,1148) ; U4.12 1838.27,971.73 1757,1053 v1(1757,1148)
  Bottom Layer w10: v1(1729,1501) 1729,1358 1757,1330 v1(1757,1148)
VREFOUT: C7.2 P7.2 R11.2 R15.2 TP3.1 U1.8 | length 1792.9
  Top Layer w10: v1(685,875) 681.56,878.44 671.56,878.44 R11.2 C7.2 ; U1.8 780,1223.82 840.24,1163.58 840.24,989.76 R15.2 868.44,878.44 853.44,878.44 v1(850,875)
  Bottom Layer w10: TP3.1 435,875 v1(685,875) v1(850,875) 1085,640 1085,565 P7.2
XTAL1: C33.2 R26.2 U4.4 Y1.2 | length 837.8
  Top Layer w10: C33.2 1404.43,1057.5 1426.93,1080 Y1.2 1459,1080 1564,1185 1585,1185 R26.2 1873.12,1195 1906.46,1161.67 1938.91,1129.21 U4.4
XTAL2: C32.2 R26.1 U4.3 Y1.1 | length 816.2
  Top Layer w10: C32.2 1300,1290 1416.93,1290 1426.93,1280 Y1.1 1565,1280 R26.1 1630,1215 1880,1215 1925,1170 1946.1,1148.9 U4.3
pads on no net: P4.1 P5.4

## Polygon pours and split planes (outlines as drawn)
GND on Top Layer "GND_L01_P008" (solid, remove dead copper, pour order 8): -6,1976 -4,1978 3934,1978 3934,-1 3932,1 -3,1 -3,1981 -4,1982
AGND on Top Layer "AGND_L01_P006" (solid, pour order 6): 17,1834 33,1818 1106,1818 1106,1021 1108,1019 1107,1018 17,1018
no net on Top Layer "NONET_L01_P002" (solid, pour order 2): 90,1890
GND on Bottom Layer "GND_L02_P009" (solid, remove dead copper, pour order 9): 0,1970 3940,1970 3940,0 3937.16,2.84 -1.76,2.84 -1.76,1968.24
no net on Bottom Layer "NONET_L02_P010" (solid, pour order 10): -110.14,1695.35
AGND on Bottom Layer "AGND_L02_P007" (solid, pour order 7): 34,1820 1106,1820 1106,1023 1100,1017 20,1017 20,1806

## Keep-outs
Top Layer:
  lines w10: 555,1735 565,1735 555,1745
Keep-Out Layer:
  lines w10: 0,118.37 0,1850.39 cw(c118.11,1850.39) 118.11,1968.5 3818.9,1968.5 cw(c3818.9,1850.39) 3937.01,1850.39 3937.01,118.11 cw(c3818.9,118.11) 3818.9,0 118.38,0

## Other copper
Multi-Layer: